# EAGLE board Lavanderia (EAGLE 7.6.0)

Size 73.58 x 444.39 mm. Coordinates in mm from the lower left corner, seen from the top.
Outline: 0,0 56.82,0 56.82,53.33 0,53.33 0,0
Copper layers (1*16): Top 0.035mm / dielectric 1.5mm / Bottom 0.035mm
Design rules "default": minimum track width 10mil, minimum drill 24mil, track to track 8mil, track to pad 8mil, pad to pad 8mil, via to via 8mil, smd to smd 8mil, copper to edge 40mil, drill to drill 8mil, minimum pad ring 10mil, minimum via ring 8mil, stop-mask expansion 4mil, vias tented up to drill 0mil, thermal gap 10mil

## Footprints (pad centres in the part's own frame; a part is rotated, then mirrored left to right if it is on the bottom)
M3XXH = drill 1.016 long: 1 -3.81,3.81; 2 -3.81,-3.81; O -6.35,-3.81; P 6.35,-3.81; P@ 6.35,3.81; S -6.35,3.81
2P-2.54-65/35MIL = drill 0.889 pad 1.651 square: 1 0,1.27 | drill 0.889 pad 1.651: 2 0,-1.27
0207/10 = drill 0.813 octagon: 1 -5.08,0; 2 5.08,0
TL1105 = drill 1 pad 1.676: 1 -2.25,3.25; 2 2.25,3.25; 3 -2.25,-3.25; 4 2.25,-3.25
1X3P-2.54-2.54-11.6-3.0-BLACK-MALE = drill 0.889 pad 1.651 square: 1 0,2.54 | drill 0.889 pad 1.651: 2 0,0; 3 0,-2.54
1X16P-2.54-2.54-11.6-3.0-BLACK-MALE = drill 0.889 pad 1.651 square: 1 0,19.05 | drill 0.889 pad 1.651: 2 0,16.51; 3 0,13.97; 4 0,11.43; 5 0,8.89; 6 0,6.35; 7 0,3.81; 8 0,1.27; 9 0,-1.27; 10 0,-3.81; 11 0,-6.35; 12 0,-8.89; 13 0,-11.43; 14 0,-13.97; 15 0,-16.51; 16 0,-19.05
ARDUINO_UNO = drill 1.016 pad 1.88: 0 63.5,50.8; 1 60.96,50.8; 2 58.42,50.8; 3 55.88,50.8; 3.3V 35.56,2.54; 4 53.34,50.8; 5 50.8,50.8; 5V 38.1,2.54; 6 48.26,50.8; 7 45.72,50.8; 8 41.656,50.8; 9 39.116,50.8; 10 36.576,50.8; 11 34.036,50.8; 12 31.496,50.8; 13 28.956,50.8; A0 50.8,2.54; A1 53.34,2.54; A2 55.88,2.54; A3 58.42,2.54; A4 60.96,2.54; A5 63.5,2.54; AREF 23.876,50.8; GND 26.416,50.8; GND. 43.18,2.54; GND.. 40.64,2.54; I/OREF 30.48,2.54; N/C 27.94,2.54; RESET 33.02,2.54; SCL 18.796,50.8; SDA 21.336,50.8; VIN 45.72,2.54 | hole 3.2: 66.04,7.62; 66.04,35.56; 15.24,50.8; 13.97,2.54

## Placement (x,y rotation side)
K1  [M3XXH]  5,251.38 0 top
L1  [2P-2.54-65/35MIL]  5,264.08 0 top
L2  [2P-2.54-65/35MIL]  5,276.78 0 top
M1  [2P-2.54-65/35MIL]  5,314.88 0 top
M2  [2P-2.54-65/35MIL]  5,327.58 0 top
M3  [2P-2.54-65/35MIL]  5,441.88 0 top
R1  1k‎Ω  [0207/10]  5,416.48 0 top
R2  1k‎Ω  [0207/10]  5,429.18 0 top
R3  1k‎Ω  [0207/10]  5,48.18 0 top
R4  1k‎Ω  [0207/10]  5,60.88 0 top
R5  1k‎Ω  [0207/10]  5,98.98 0 top
R6  1k‎Ω  [0207/10]  5,111.68 0 top
R7  10‎Ω  [0207/10]  5,149.78 0 top
R8  1k‎Ω  [0207/10]  5,162.48 0 top
R9  1k‎Ω  [0207/10]  5,200.58 0 top
R10  1k‎Ω  [0207/10]  5,213.28 0 top
S1  [TL1105]  5,225.98 0 top
S2  [TL1105]  5,454.58 0 top  (outside the outline)
S3  [TL1105]  5,340.28 0 top
S4  [TL1105]  5,352.98 0 top
S5  [TL1105]  5,365.68 0 top
S6  [TL1105]  5,378.38 0 top
S7  [TL1105]  5,467.28 0 top  (outside the outline)
SBotão Cancelar  [TL1105]  5,289.48 0 top
SBotão OK  [TL1105]  5,302.18 0 top
SERVO1  [1X3P-2.54-2.54-11.6-3.0-BLACK-MALE]  5,238.68 0 top
U2  [1X16P-2.54-2.54-11.6-3.0-BLACK-MALE]  5,403.78 0 top
U3  [1X16P-2.54-2.54-11.6-3.0-BLACK-MALE]  5,137.08 0 top
U4  [1X16P-2.54-2.54-11.6-3.0-BLACK-MALE]  5,35.48 0 top
U5  [1X16P-2.54-2.54-11.6-3.0-BLACK-MALE]  5,187.88 0 top
U6  [1X16P-2.54-2.54-11.6-3.0-BLACK-MALE]  5,86.28 0 top
UArduino Secador  [ARDUINO_UNO]  5,73.58 0 top
UAtendimento  [ARDUINO_UNO]  5,124.38 0 top
UComunicador  [ARDUINO_UNO]  5,10.08 0 top
ULavadora 1  [ARDUINO_UNO]  5,22.78 0 top
ULavadora 2  [ARDUINO_UNO]  5,391.08 0 top
UResidencial  [ARDUINO_UNO]  5,175.18 0 top

## Library data of the parts
K1 L1 L2 M1-M3 R1-R10 S1-S7 SBotão Cancelar SBotão OK SERVO1 U2-U6 UArduino Secador UAtendimento UComunicador ULavadora 1 ULavadora 2 UResidencial = AUTODESK_CIRCUITS_BREADBOARD

## Nets
N$1: U4.11 ULavadora 1.4
N$2: U4.12 ULavadora 1.5
N$3: U4.13 ULavadora 1.6
N$4: U4.14 ULavadora 1.7
N$5: R3.1 U4.3
N$6: R4.1 U4.15
N$7: R4.2 U4.2 ULavadora 1.5V
N$8: R3.2 U4.1 U4.5 U4.16 ULavadora 1.GND..
N$9: U6.11 UArduino Secador.4
N$10: U6.12 UArduino Secador.5
N$11: U6.13 UArduino Secador.6
N$12: U6.14 UArduino Secador.7
N$13: R5.2 U6.1 U6.5 U6.16 UArduino Secador.GND.
N$14: R6.2 U6.2 UArduino Secador.5V
N$15: U3.11 UAtendimento.4
N$16: U3.12 UAtendimento.5
N$17: U3.13 UAtendimento.6
N$18: U3.14 UAtendimento.7
N$19: R8.2 U3.2 UAtendimento.5V
N$20: U5.11 UResidencial.4
N$21: U5.12 UResidencial.5
N$22: U5.13 UResidencial.6
N$23: U5.14 UResidencial.7
N$24: U5.6 UResidencial.3
N$25: R9.2 U5.1 U5.5 U5.16 UResidencial.GND.
N$26: K1.S R10.2 SERVO1.2 U5.2 UResidencial.5V
N$27: SERVO1.3 UResidencial.9
N$28: K1.1 UResidencial.8
N$29: K1.P@ L1.2 L2.2
N$30: S1.4 UResidencial.2
N$31: U5.4 UResidencial.10
N$32: R9.1 U5.3
N$33: R10.1 U5.15
N$34: R8.1 U3.15
N$35: R7.1 U3.3
N$36: M2.2 UArduino Secador.10
N$37: R5.1 U6.3
N$38: R6.1 U6.15
N$39: M1.2 ULavadora 1.10
N$40: M1.1 ULavadora 1.GND.
N$41: S4.1
N$42: U4.4 ULavadora 1.11
N$43: U6.4 UArduino Secador.11
N$44: U6.6 UArduino Secador.9
N$45: S3.4 UArduino Secador.2
N$46: S5.4 UArduino Secador.3
N$47: R7.2 U3.1 U3.5 U3.16 UAtendimento.GND..
N$48: U3.4 UAtendimento.11
N$49: U3.6 UAtendimento.9
N$50: SBotão OK.1 UAtendimento.2
N$51: SBotão Cancelar.1 UAtendimento.3
N$52: U4.6 ULavadora 1.9
N$53: S6.4 ULavadora 1.3
N$54: S4.4 ULavadora 1.2
N$55: UArduino Secador.SCL UAtendimento.SCL UComunicador.SCL ULavadora 1.SCL ULavadora 2.SCL UResidencial.SCL
N$56: UArduino Secador.SDA UAtendimento.SDA UComunicador.SDA ULavadora 1.SDA ULavadora 2.SDA UResidencial.SDA
N$57: U2.4 ULavadora 2.11
N$58: U2.6 ULavadora 2.9
N$59: U2.11 ULavadora 2.4
N$60: U2.12 ULavadora 2.5
N$61: U2.13 ULavadora 2.6
N$62: U2.14 ULavadora 2.7
N$63: R2.2 U2.2 ULavadora 2.5V
N$64: R1.2 U2.1 U2.5 U2.16 ULavadora 2.GND..
N$65: M3.2 ULavadora 2.10
N$66: M3.1 ULavadora 2.GND.
N$67: S2.4 ULavadora 2.2
N$68: K1.2 L1.1 L2.1 M2.1 S1.3 S2.3 S3.3 S4.3 S5.3 S6.3 S7.3 SBotão Cancelar.2 SBotão OK.2 SERVO1.1 UArduino Secador.GND UAtendimento.GND UComunicador.GND ULavadora 1.GND ULavadora 2.GND UResidencial.GND
N$69: S7.4 ULavadora 2.3

## Tracks (layer width: path | path; a pad name or v marks a point on that pad's centre or on a via)
N$1  (1 unrouted)
N$2  (1 unrouted)
N$3  (1 unrouted)
N$4  (1 unrouted)
N$5  (1 unrouted)
N$6  (1 unrouted)
N$7  (2 unrouted)
N$8  (4 unrouted)
N$9  (1 unrouted)
N$10  (1 unrouted)
N$11  (1 unrouted)
N$12  (1 unrouted)
N$13  (4 unrouted)
N$14  (2 unrouted)
N$15  (1 unrouted)
N$16  (1 unrouted)
N$17  (1 unrouted)
N$18  (1 unrouted)
N$19  (2 unrouted)
N$20  (1 unrouted)
N$21  (1 unrouted)
N$22  (1 unrouted)
N$23  (1 unrouted)
N$24  (1 unrouted)
N$25  (4 unrouted)
N$26  (4 unrouted)
N$27  (1 unrouted)
N$28  (1 unrouted)
N$29  (2 unrouted)
N$30  (1 unrouted)
N$31  (1 unrouted)
N$32  (1 unrouted)
N$33  (1 unrouted)
N$34  (1 unrouted)
N$35  (1 unrouted)
N$36  (1 unrouted)
N$37  (1 unrouted)
N$38  (1 unrouted)
N$39  (1 unrouted)
N$40  (1 unrouted)
N$42  (1 unrouted)
N$43  (1 unrouted)
N$44  (1 unrouted)
N$45  (1 unrouted)
N$46  (1 unrouted)
N$47  (4 unrouted)
N$48  (1 unrouted)
N$49  (1 unrouted)
N$50  (1 unrouted)
N$51  (1 unrouted)
N$52  (1 unrouted)
N$53  (1 unrouted)
N$54  (1 unrouted)
N$55  (5 unrouted)
N$56  (5 unrouted)
N$57  (1 unrouted)
N$58  (1 unrouted)
N$59  (1 unrouted)
N$60  (1 unrouted)
N$61  (1 unrouted)
N$62  (1 unrouted)
N$63  (2 unrouted)
N$64  (4 unrouted)
N$65  (1 unrouted)
N$66  (1 unrouted)
N$67  (1 unrouted)
N$68  (19 unrouted)
N$69  (1 unrouted)